# Altium PCB GCM_PCB2.PcbDoc
Units mm, origin at the board's own origin, x right, y up, seen from the top; angles counter-clockwise.
Board outline 75 x 98.5 mm, 4 copper layers (Top Layer, GND, Power and signals, Bottom Layer), stack 0.603 mm thick; 157 components, 99 nets, 525 pads, 0 vias.
Unrouted connection lines stored in the file: 354.
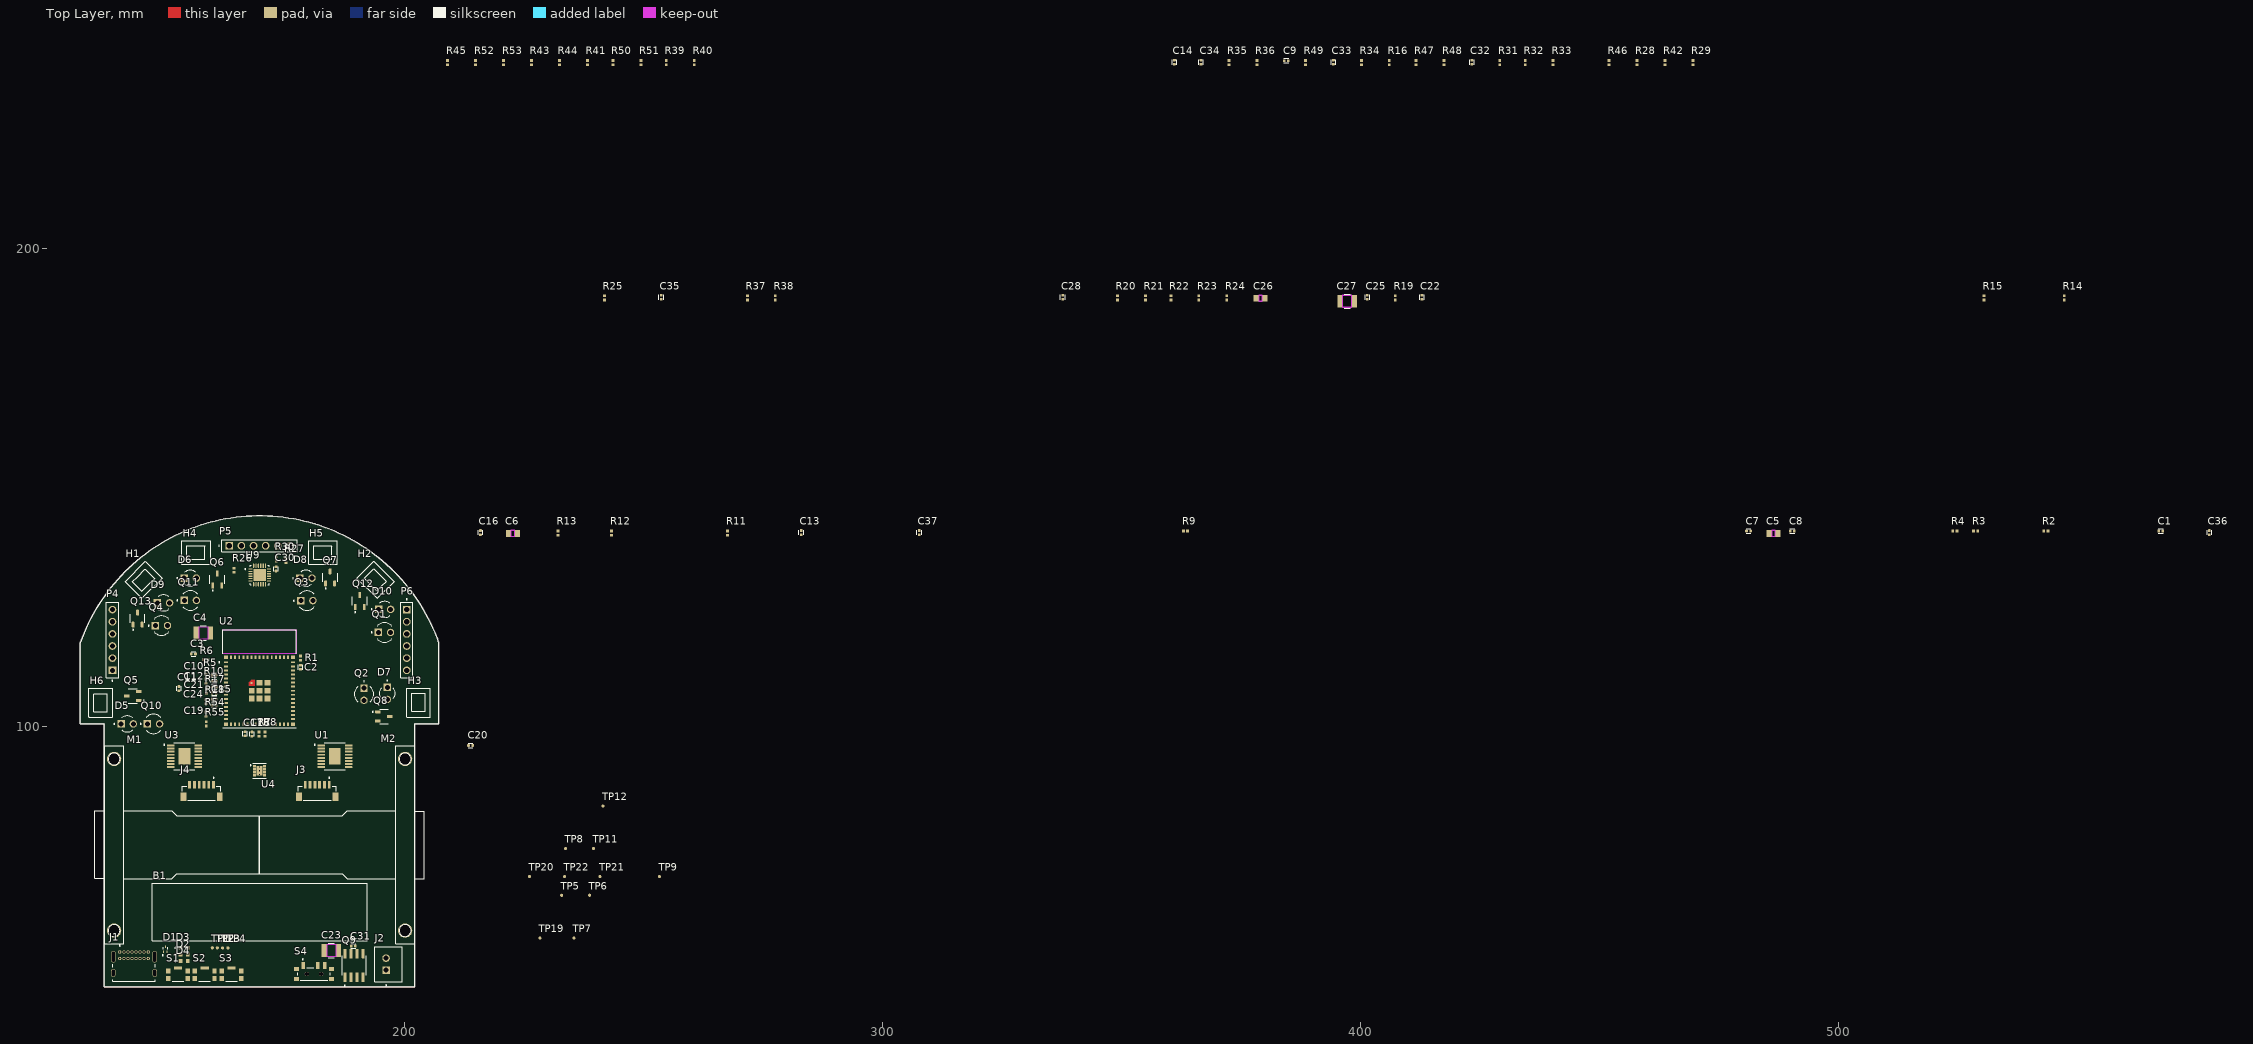
[diagram p0: Top Layer view]
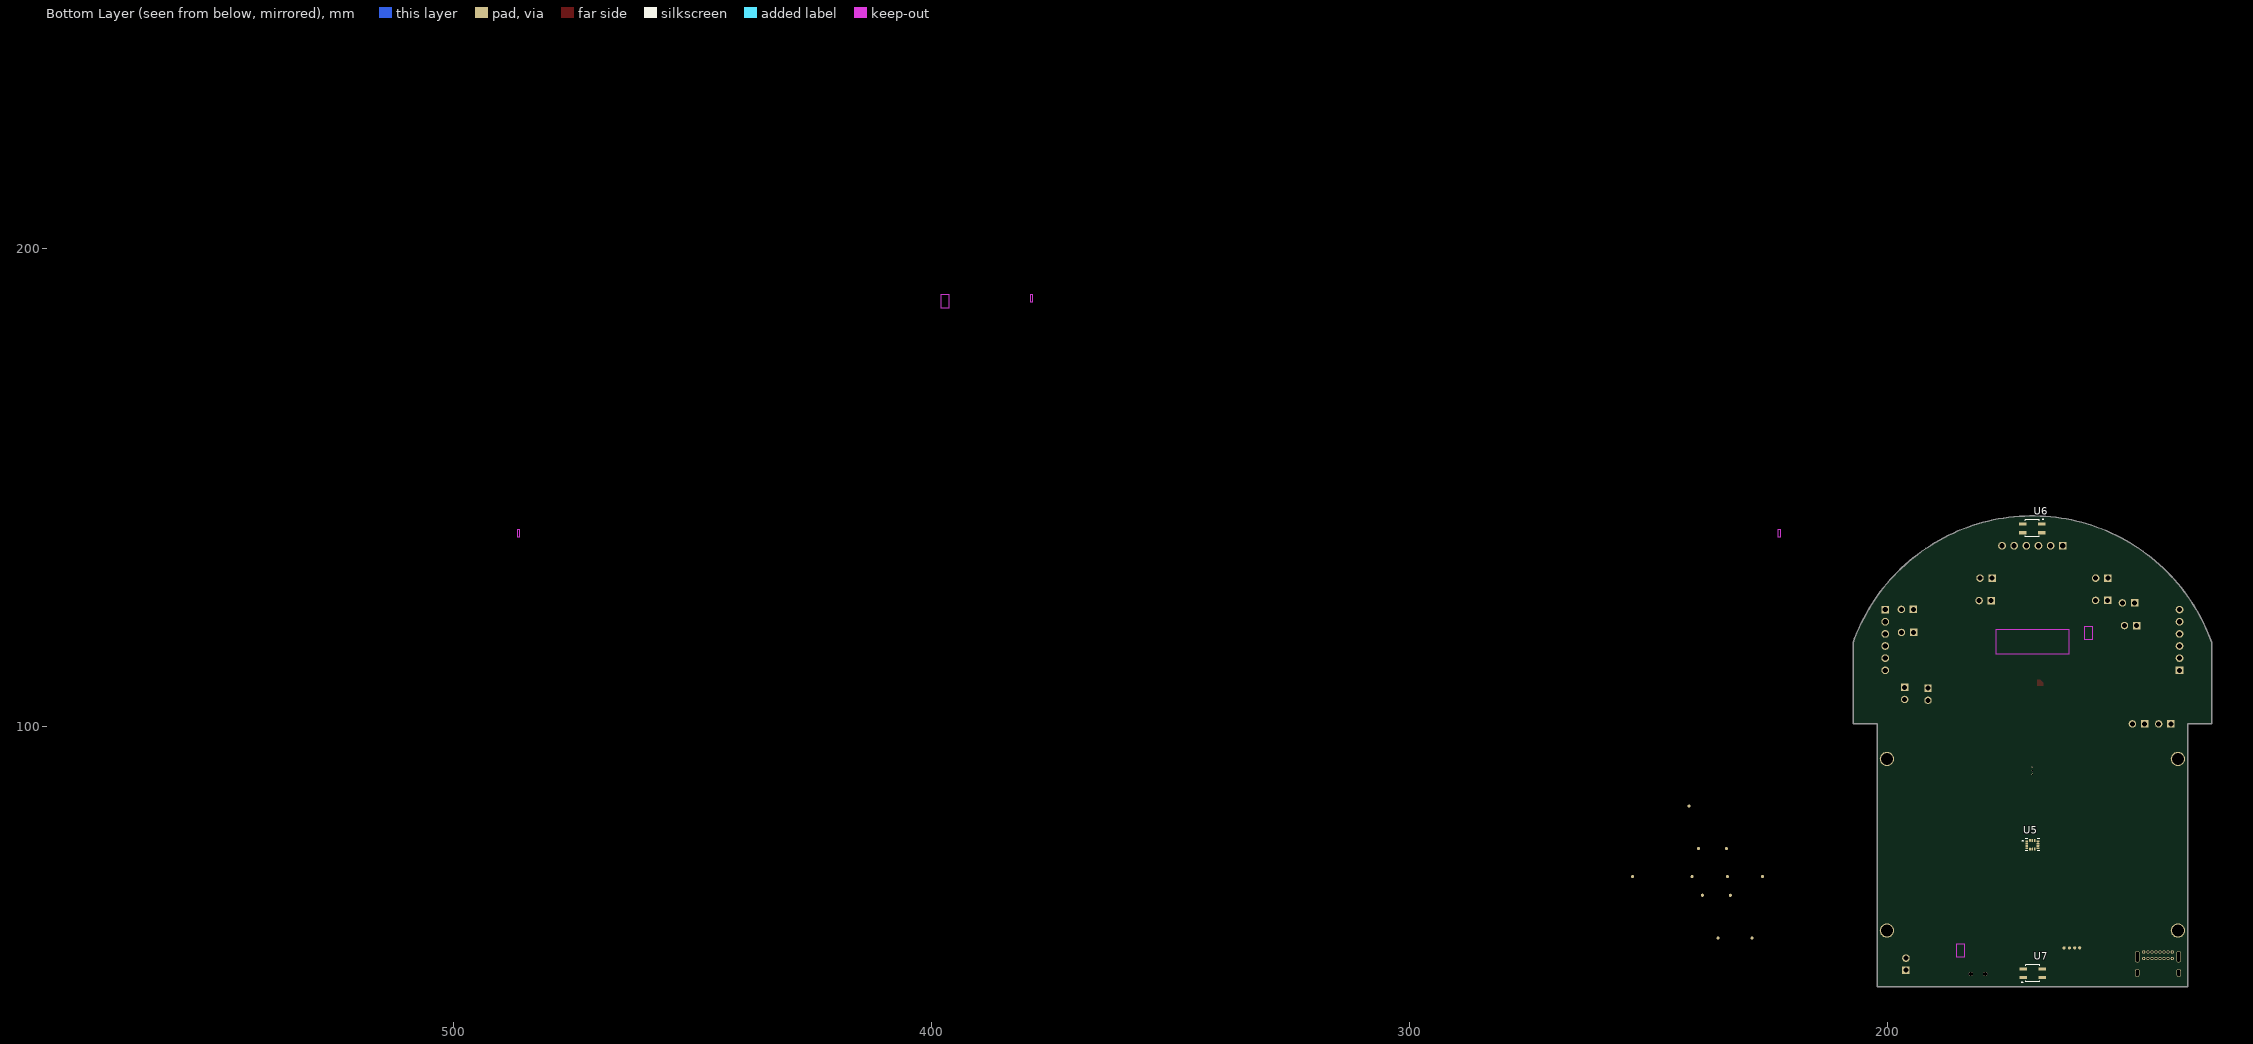
[diagram p1: Bottom Layer view, seen from below]
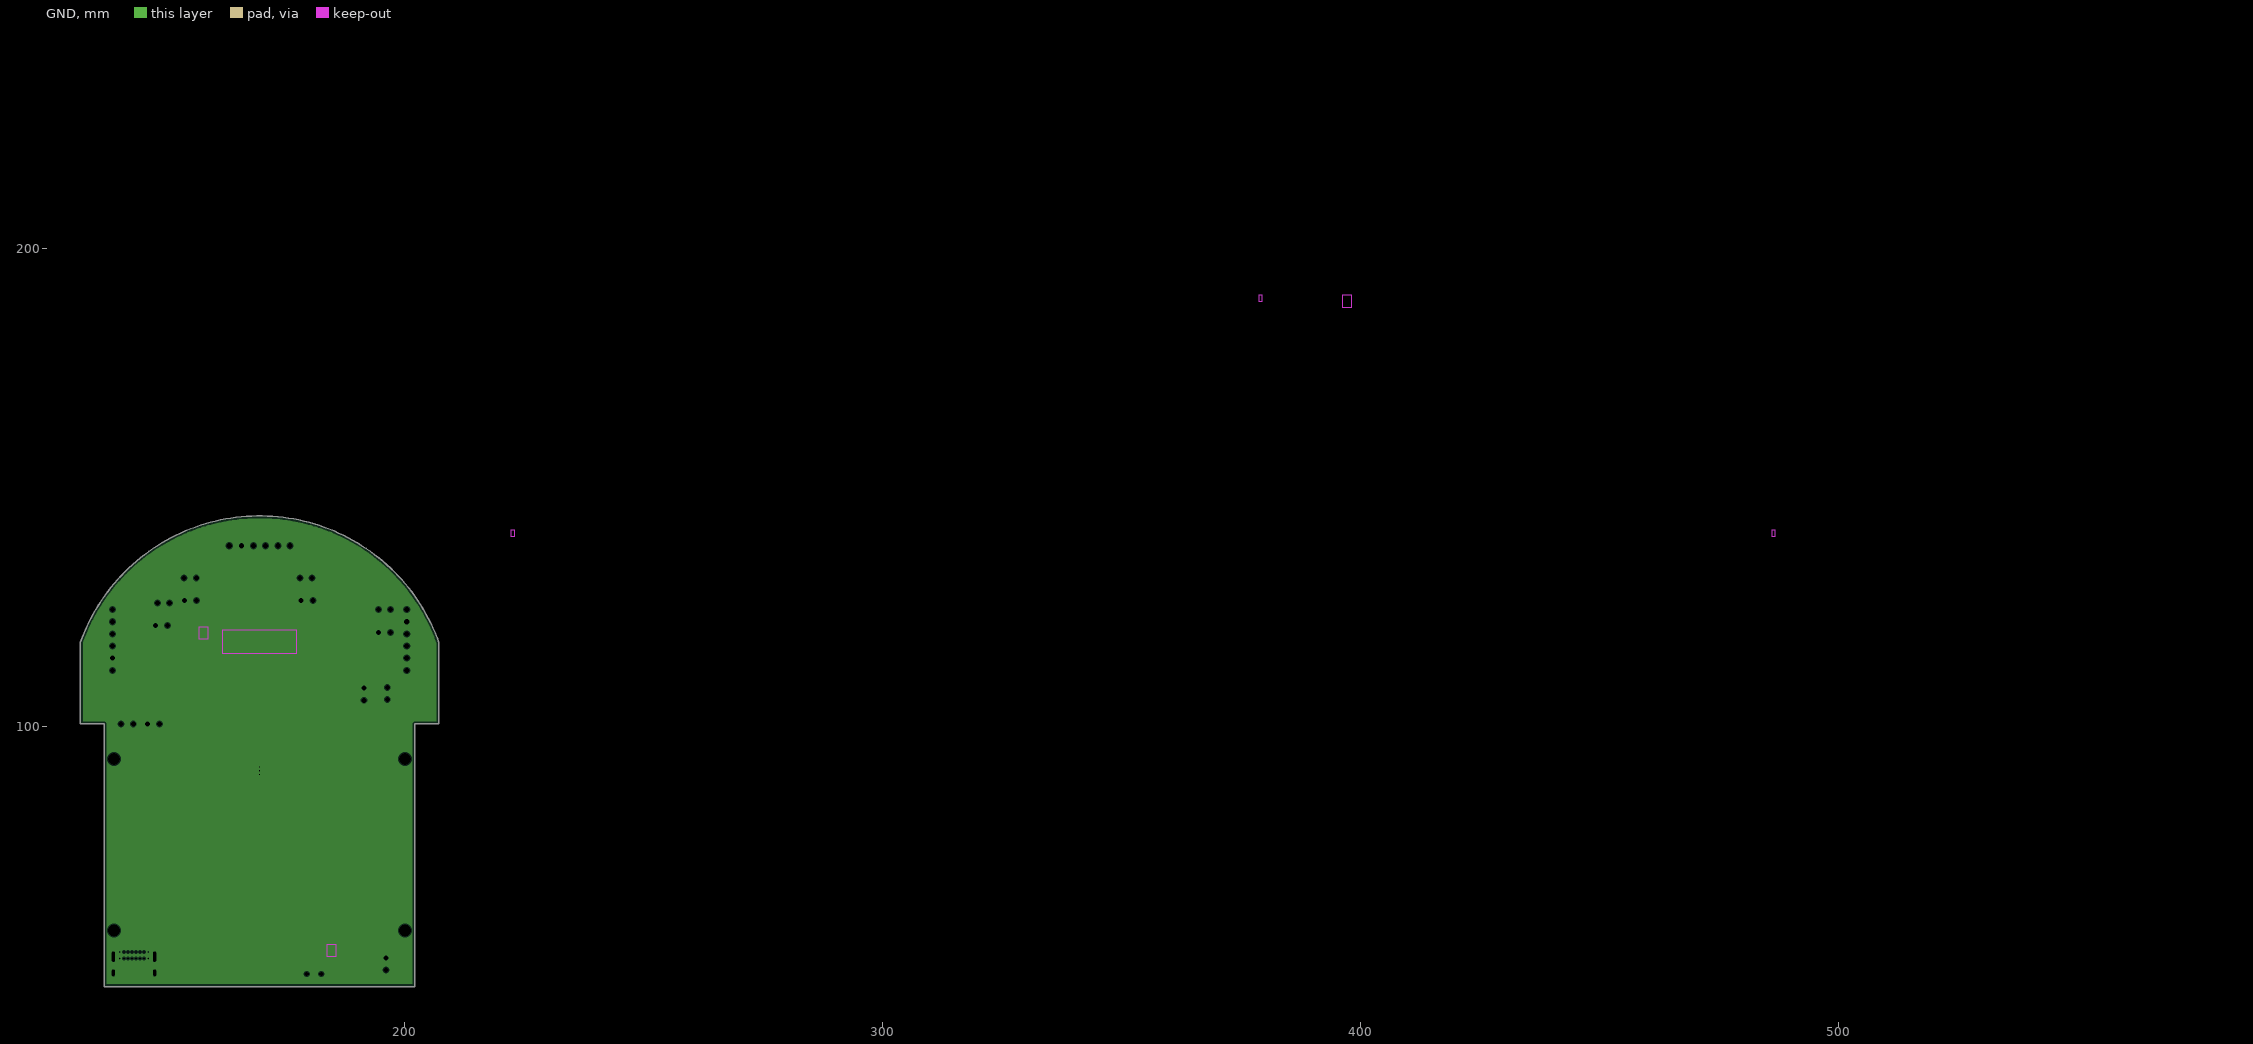
[diagram p2: GND, clearances drawn from the general rule]

## Layer stack, top to bottom
Top Solder: solder mask 0.0102, Solder Resist, Dk 3.5
Top Layer: signal copper 0.0356
Dielectric 2: prepreg 0.0711, PP-006, Dk 4.1
GND: plane copper 0.035, net GND
Dielectric 1: dielectric 0.32, FR-4, Dk 4.8
Power and signals: signal copper 0.035
Dielectric 3: prepreg 0.0711, PP-006, Dk 4.1
Bottom Layer: signal copper 0.0356
Bottom Solder: solder mask 0.0102, Solder Resist, Dk 3.5

## Board outline
132.144,100.563 132.144,117.563 cw(c169.644,104.28) 207.144,117.563 207.144,100.563 202.144,100.563 202.144,45.563 137.144,45.563 137.144,100.563

## Design rules (kind name [scope] priority, off if disabled: settings)
Clearance [All] p1: gap=0.15 ignorepadtopadclearanceinfootprint=FALSE
ComponentClearance [All] p1: gap=0 collisioncheckmode=3 verticalgap=2540 showdistances=FALSE checkcomponentboundary=TRUE
DiffPairsRouting [All] p1: maxlimit=0.254 minlimit=0.254 mostfreqgap=0.254 toplayer_minwidth=0.381 toplayer_maxwidth=0.381 toplayer_prefwidth=0.381 midlayer1_minwidth=0.381 midlayer1_maxwidth=0.381 midlayer1_prefwidth=0.381 bottomlayer_minwidth=0.381 bottomlayer_maxwidth=0.381 bottomlayer_prefwidth=0.381 maxuncoupledlength=12.7
PlaneClearance [All] p1: clearance=0.2
PlaneConnect [All] p1: planeconnectstyle=Relief reliefexpansion=0.508 reliefentries=4 reliefconductorwidth=0.254 reliefairgap=0.254
PolygonConnect [All] p1: connectstyle=Relief reliefconductorwidth=0.254 reliefentries=4 polygonreliefangle="90 Angle" airgapwidth=0.254
RoutingVias [All] p1: holewidth=0.25 width=0.5 viastyle="Through Hole" minholewidth=0.25 minwidth=0.5 maxholewidth=0.25 maxwidth=0.5
SolderMaskExpansion [All] p1: expansion=0.102 istentingtop=FALSE
Width [InNetClass('1.2mm')] p1: maxlimit=1.2 minlimit=1.2 preferedwidth=1.2
26 further rules are at their usual default settings.

## Classes and differential pairs
net class 1.2mm: "1 M1" "1 M2" "2 M1" "2 M2" BAT "VM M1"
differential pair USB: +USB_P -USB_N

## Components (designator, comment, footprint, x,y, rotation, side; value= is the part's Value field where it differs from the comment)
B1 "Bateria" Bateria 169.637,61.2 r180 top
C1 "C426639" CAPC1005X55N 567.419,140.88 r0 top
C2 "C541465" CAPC1005X55N 178.2,112.39 r90 top
C3 "C541465" CAPC1005X55N 155.8,115.2 r0 top
C4 "C914881" CAP_CC1210_YAG 157.851,119.55 r0 top
C5 "C326595" CAP_CC0805_YAG 486.399,140.39 r0 top
C6 "C326595" CAP_CC0805_YAG 222.62,140.39 r0 top
C7 "C541465" CAPC1005X55N 481.159,140.88 r0 top
C8 "C541465" CAPC1005X55N 490.329,140.88 r0 top
C9 "C541465" CAPC1005X55N 384.449,239.3 r0 top
C10 "C541465" CAPC1005X55N 160.08,110.74 r180 top
C11 "C541465" CAPC1005X55N 152.76,107.94 r90 top
C12 "C541465" CAPC1005X55N 160.14,109.45 r180 top
C13 "C426639" CAPC1005X55N 282.969,140.57 r90 top
C14 "C541465" CAPC1005X55N 361.029,238.99 r90 top
C15 "C541465" CAPC1005X55N 160.16,105.7 r180 top
C16 "C541465" CAPC1005X55N 215.82,140.57 r90 top
C17 "C541443" CAPC1005X55N 166.59,98.45 r90 top
C18 "C541443" CAPC1005X55N 168.03,98.42 r90 top
C19 "C541465" CAPC1005X55N 160.15,104.45 r180 top
C20 "C541465" CAPC1005X55N 213.77,96.05 r180 top
C21 "C541465" CAPC1005X55N 160.17,108.24 r180 top
C22 "C541465" CAPC1005X55N 412.829,189.78 r90 top
C23 "C914881" CAP_CC1210_YAG 184.65,53.13 r0 top
C24 "C541465" CAPC1005X55N 160.13,107.01 r180 top
C25 "C527004" CAPC1005X55N 401.399,189.78 r90 top
C26 "C326595" CAP_CC0805_YAG 379.039,189.6 r0 top
C27 "C914881" CAP_CC1210_YAG 397.169,188.97 r0 top
C28 "C541465" CAPC1005X55N 337.679,189.78 r90 top
C30 "C541465" CAPC1005X55N 173.1,132.96 r90 top
C31 "C541465" CAPC1005X55N 189.26,54.06 r0 top
C32 "C541465" CAPC1005X55N 423.269,238.99 r90 top
C33 "C541465" CAPC1005X55N 394.299,238.99 r90 top
C34 "C541465" CAPC1005X55N 366.609,238.99 r90 top
C35 "C541465" CAPC1005X55N 253.679,189.78 r90 top
C36 "C541443" CAPC1005X55N 577.569,140.57 r90 top
C37 "C541443" CAPC1005X55N 307.659,140.57 r90 top
D1 "C97502" SOTFL35P100X50-3N 149.93,53.38 r90 top
D2 "C12624" LED_SM0603UYC 153.86,52.29 r0 top
D3 "C125095" LED_SM0603UYC 153.86,53.69 r0 top
D4 "C965799" LED_SM0603UYC 153.87,50.9 r0 top
D5 "C94135" LEDRD254W45D335H610 141.94,100.53 r0 top
D6 "C94135" LEDRD254W45D335H610 155.12,131.03 r0 top
D7 "C94135" LEDRD254W45D335H610 196.35,106.92 r270 top
D8 "C94135" LEDRD254W45D335H610 179.33,131.03 r0 top
D9 "C94135" LEDRD254W45D335H610 149.53,125.85 r0 top
D10 "C94135" LEDRD254W45D335H610 195.79,124.49 r0 top
H1 "IR Holder" "IR Holder" 145.424,130.625 r45 top
H2 "IR Holder" "IR Holder" 193.85,130.625 r315 top
H3 "IR Holder" "IR Holder" 202.824,104.975 r270 top
H4 "IR Holder" "IR Holder" 156.38,136.34 r0 top
H5 "IR Holder" "IR Holder" 182.89,136.34 r0 top
H6 "IR Holder" "IR Holder" 136.436,104.975 r90 top
J1 "C7095263" GCT_USB4085-GF-A_REVA4 143.36,48.45 r0 top
J2 "C158012" JST_B2B-XH-A 196.615,50.26 r270 top
J3 "C495540" JST-SH6 181.7,86.02 r180 top
J4 "C495540" JST-SH6 157.5,86.02 r180 top
M1 "Motor" MotionSupport 152.294,75.25 r0 top locked
M2 "Motor" MotionSupport 186.98,75.25 r180 top locked
P4 "C40877" FHDR1X6 138.85,118.1 r90 top
P5 "C40877" FHDR1X6 169.64,137.81 r0 top
P6 "C40877" FHDR1X6 200.424,118.1 r270 top locked
Q1 "C118301" XDCR_TEFT4300 195.76,119.67 r0 top
Q2 "C118301" XDCR_TEFT4300 191.48,106.75 r270 top
Q3 "C118301" XDCR_TEFT4300 179.53,126.33 r0 top
Q4 "C118301" XDCR_TEFT4300 149.1,121.11 r0 top
Q5 "C20917" SOT95P280X125-3N 143.09,106.38 r180 top
Q6 "C20917" SOT95P280X125-3N 160.78,130.75 r90 top
Q7 "C20917" SOT95P280X125-3N 184.39,131.185 r90 top
Q8 "C20917" SOT95P280X125-3N 195.63,102.1 r0 top
Q9 "C51499" SOIC127P600X175-8N 189.4,50 r90 top
Q10 "C118301" XDCR_TEFT4300 147.44,100.54 r0 top
Q11 "C118301" XDCR_TEFT4300 155.15,126.37 r0 top
Q12 "C20917" SOT95P280X125-3N 190.59,126.235 r90 top
Q13 "C20917" SOT95P280X125-3N 144.11,122.565 r90 top
R1 "C190095" RESC1005X35N 178.19,114.295 r90 top
R2 "C851064" RESC1005X35N 543.369,140.88 r0 top
R3 "C851064" RESC1005X35N 528.679,140.88 r0 top
R4 "C853263" RESC1005X35N 524.349,140.88 r0 top
R5 "C513664" RESC1005X35N 158.39,111.31 r90 top
R6 "C190095" RESC1005X35N 158.45,113.99 r180 top
R7 "C853143" RESC1005X35N 169.53,98.42 r90 top
R8 "C853143" RESC1005X35N 170.74,98.42 r90 top
R9 "C190095" RESC1005X35N 363.359,140.88 r0 top
R10 "C513664" RESC1005X35N 158.43,109.5 r90 top
R11 "C852752" RESC1005X35N 267.549,140.47 r90 top
R12 "C853263" RESC1005X35N 243.27,140.47 r90 top
R13 "C852886" RESC1005X35N 232.09,140.47 r90 top
R14 "C852886" RESC1005X35N 547.219,189.68 r90 top
R15 "C190095" RESC1005X35N 530.459,189.68 r90 top
R16 "C853143" RESC1005X35N 405.989,238.89 r90 top
R17 "C513664" RESC1005X35N 158.5,107.42 r90 top
R18 "C513664" RESC1005X35N 158.43,105.16 r90 top
R19 "C281774" RESC1005X35N 407.239,189.68 r90 top
R20 "C281778" RESC1005X35N 349.119,189.68 r90 top
R21 "C705627" RESC1005X35N 354.959,189.68 r90 top
R22 "C850993" RESC1005X35N 360.299,189.68 r90 top
R23 "C705627" RESC1005X35N 366.139,189.68 r90 top
R24 "C850993" RESC1005X35N 371.979,189.68 r90 top
R25 "C136979" RESC1005X35N 241.8,189.68 r90 top
R26 "C190095" RESC1005X35N 164.28,132.7 r90 top
R27 "C281778" RESC1005X35N 175.13,134.69 r90 top
R28 "C728561" RESC1005X35N 457.819,238.89 r90 top
R29 "C136979" RESC1005X35N 469.509,238.89 r90 top
R30 "C281778" RESC1005X35N 173.12,135.07 r90 top
R31 "C853143" RESC1005X35N 429.109,238.89 r90 top
R32 "C850993" RESC1005X35N 434.449,238.89 r90 top
R33 "C853143" RESC1005X35N 440.289,238.89 r90 top
R34 "C850993" RESC1005X35N 400.149,238.89 r90 top
R35 "C853143" RESC1005X35N 372.459,238.89 r90 top
R36 "C850993" RESC1005X35N 378.299,238.89 r90 top
R37 "C853143" RESC1005X35N 271.689,189.68 r90 top
R38 "C850993" RESC1005X35N 277.529,189.68 r90 top
R39 "C705627" RESC1005X35N 254.729,238.89 r90 top
R40 "C705627" RESC1005X35N 260.579,238.89 r90 top
R41 "C705627" RESC1005X35N 238.22,238.89 r90 top
R42 "C705627" RESC1005X35N 463.669,238.89 r90 top
R43 "C190095" RESC1005X35N 226.53,238.89 r90 top
R44 "C190095" RESC1005X35N 232.37,238.89 r90 top
R45 "C190095" RESC1005X35N 208.99,238.89 r90 top
R46 "C190095" RESC1005X35N 451.979,238.89 r90 top
R47 "C850993" RESC1005X35N 411.579,238.89 r90 top
R48 "C853143" RESC1005X35N 417.429,238.89 r90 top
R49 "C850993" RESC1005X35N 388.459,238.89 r90 top
R50 "C705627" RESC1005X35N 243.55,238.89 r90 top
R51 "C705627" RESC1005X35N 249.4,238.89 r90 top
R52 "C190095" RESC1005X35N 214.84,238.89 r90 top
R53 "C190095" RESC1005X35N 220.68,238.89 r90 top
R54 "C513664" RESC1005X35N 158.46,102.585 r90 top
R55 "C513664" RESC1005X35N 158.47,100.525 r90 top
S1 "C72443" SW_KMR221GLFS 152.58,48.045 r0 top
S2 "C72443" SW_KMR221GLFS 158.15,48.05 r0 top
S3 "C72443" SW_KMR221GLFS 163.74,48.05 r0 top
S4 "C3664642" SW_EG1215AA 181.02,48.22 r0 top
TP1 "Test Point" TestPoint 159.74,53.7 r90 top
TP2 "Test Point" TestPoint 160.78,53.69 r90 top
TP3 "Test Point" TestPoint 161.88,53.68 r90 top
TP4 "Test Point" TestPoint 163.01,53.67 r90 top
TP5 "Test Point" TestPoint 232.84,64.68 r90 top
TP6 "Test Point" TestPoint 238.69,64.68 r90 top
TP7 "Test Point" TestPoint 235.389,55.74 r90 top
TP8 "Test Point" TestPoint 233.67,74.46 r90 top
TP9 "Test Point" TestPoint 253.279,68.6 r90 top
TP11 "Test Point" TestPoint 239.52,74.46 r90 top
TP12 "Test Point" TestPoint 241.48,83.33 r90 top
TP19 "Test Point" TestPoint 228.269,55.74 r90 top
TP20 "Test Point" TestPoint 226.089,68.6 r90 top
TP21 "Test Point" TestPoint 240.829,68.6 r90 top
TP22 "Test Point" TestPoint 233.459,68.6 r90 top
U1 "C1855818" SOP65P640X120-17N 185.375,93.76 r0 top locked
U2 "C2913206" XCVR_ESP32-S3-MINI-1-N8 169.63,107.48 r0 top
U3 "C1855818" SOP65P640X120-17N 153.899,93.76 r0 top
U4 "C163210" CONV_TPS82140SILR 169.64,90.735 r0 top
U5 "C22459454" PQFN50P300X250X97-14N 169.637,75.25 r180 bottom locked
U6 "C232862" SOIC180P460X187-4N 169.637,141.46 r270 bottom
U7 "C232862" SOIC180P460X187-4N 169.6,48.37 r90 bottom
U9 "C140277" QFN50P400X400X80-25N 169.635,131.69 r0 top

## Footprints (in the part's own frame and the unit in brackets; to place one, negate y for a bottom-side part, rotate by r counter-clockwise, add the part's x,y. Pads: shape width x height; smd on the part's side, far side on the other; paste and mask are expansions set on the pad)
Bateria [mm]
  silkscreen extent -22.5,-6 22.5,6.06, body extent -22.52,-5.94 22.48,6.06, height 16
CAP_CC0805_YAG [mil]
  rect 44x57 smd paste+0 mask+0: 1(-35.31,0) 2(35.31,0)
  Top Layer keep-out region: -11.31,-26.5 -11.31,26.5 11.31,26.5 11.31,-26.5
  Keep-Out Layer region: -11.31,-28.5 -11.31,28.5 11.31,28.5 11.31,-28.5
  body extent -43,-29 43,29, height 57
CAP_CC1210_YAG [mil]
  rect 44x106 smd paste+0 mask+0: 1(-59,0) 2(59,0)
  Top Layer keep-out region: -35,-51 -35,51 35,51 35,-51
  Keep-Out Layer region: -35,-53 -35,53 35,53 35,-53
  silkscreen extent -25,-58 25,58, body extent -67,-53 67,53, height 106
CAPC1005X55N [mm]
  rrect53% 0.54x0.6 smd: 1(-0.43,0) 2(0.43,0)
  silkscreen extent -0.5,-0.48 0.5,0.48, body extent -0.5,-0.25 0.5,0.25, height 0.55
CONV_TPS82140SILR [mm]
  rrect5% 0.6x0.5 smd paste-1 mask+0: 1(-1.05,0.975) 2(-1.05,0.325) 3(-1.05,-0.325) 4(-1.05,-0.975) 5(1.05,-0.975) 6(1.05,-0.325) 7(1.05,0.325) 8(1.05,0.975)
  rrect5% 1.2x2 smd paste-2 mask+0: 9(0,0)
  round 0.3 hole 0.2 mask+0: 10(0,0.75) 11(0,0) 12(0,-0.75)
  silkscreen extent -2,-1.55 1.4,1.55, body extent -1.5,-1.4 1.5,1.4, height 1.53
FHDR1X6 [mm]
  rect 1.605x1.605 / inner round 1.605 / far side rect 1.605x1.605 hole 1.07: 1(-6.35,0)
  round 1.605 hole 1.07: 2(-3.81,0) 3(-1.27,0) 4(1.27,0) 5(3.81,0) 6(6.35,0)
  silkscreen extent -8.6,-1.27 7.87,1.27, body extent -7.87,-1.27 7.88,1.27, height 8.51
GCT_USB4085-GF-A_REVA4 [mm]
  round 0.65 hole 0.4: A1(-2.975,4.36) A4(-2.125,4.36) A5(-1.275,4.36) A6(-0.425,4.36) A7(0.425,4.36) A8(1.275,4.36) A9(2.125,4.36) A12(2.975,4.36) B1(2.975,3.01) B4(2.125,3.01) B5(1.275,3.01) B6(0.425,3.01) B7(-0.425,3.01) B8(-1.275,3.01) B9(-2.125,3.01) B12(-2.975,3.01)
  oval 0.9x1.7 hole 0.6 slot 1.4 at 90 deg: S1(-4.325,0) S2(4.325,0)
  oval 0.9x2.4 hole 0.6 slot 2.1 at 90 deg: S3(-4.325,3.38) S4(4.325,3.38)
  silkscreen extent -4.47,-1.74 4.47,5.8, body extent -4.47,-4.25 4.47,4.92, height 3.46
"IR Holder" [mm]
  silkscreen extent -3.01,-2.43 3,2.55, body extent -3.01,-2.49 2.99,2.51, height 10.6
JST-SH6 [mm]
  rect 0.6x1.55 smd: 1(-2.5,-1.775) 2(-1.5,-1.775) 3(-0.5,-1.775) 4(0.5,-1.775) 5(1.5,-1.775) 6(2.5,-1.775)
  rect 1.2x1.8 smd: S1(-3.8,0.75) S2(3.8,0.75)
  silkscreen extent -4,-3.35 4,1.45, body extent -3.87,-2.14 4.13,1.46, height 4.25
JST_B2B-XH-A [mm]
  rect 1.575x1.575 / inner round 1.575 / far side rect 1.575x1.575 hole 1.05: 1(1.25,-0.525)
  round 1.575 hole 1.05: 2(-1.25,-0.525)
  silkscreen extent -3.7,-2.88 4.54,2.88, body extent -3.72,-2.88 3.68,2.88, height 7
LED_SM0603UYC [mm]
  rect 0.8x0.8 smd: A(0.75,0) C(-0.75,0)
  silkscreen extent -1.95,-0.1 -1.75,0.1, body extent -0.8,-0.4 0.8,0.4, height 0.6
LEDRD254W45D335H610 [mm]
  round 1.56 hole 1.04: A(1.27,0)
  rect 1.56x1.56 hole 1.04: C(-1.27,0)
  silkscreen extent -2.8,-1.68 1.12,1.68, body extent -1.6,-1.95 1.6,1.95, height 6.1
MotionSupport [mm]
  round 3 hole 2.5: 14(-13.1,17.95) 15(-13.1,-17.95)
  silkscreen extent -17.1,-20.75 17.4,20.75, body extent -25.07,-20.76 17.39,20.74, height 17.8
PQFN50P300X250X97-14N [mm]
  rrect50% 0.59x0.35 smd mask+0: 1(-1.165,0.75) 2(-1.165,0.25) 3(-1.165,-0.25) 4(-1.165,-0.75) 8(1.165,-0.75) 9(1.165,-0.25) 10(1.165,0.25) 11(1.165,0.75)
  rrect50% 0.35x0.59 smd mask+0: 5(-0.5,-0.915) 6(0,-0.915) 7(0.5,-0.915) 12(0.5,0.915) 13(0,0.915) 14(-0.5,0.915)
  silkscreen extent -2.1,-1.25 1.5,1.25, body extent -1.5,-1.27 1.5,1.23, height 0.97
QFN50P400X400X80-25N [mm]
  rrect25% 0.86x0.27 smd: 1(-1.935,1.25) 2(-1.935,0.75) 3(-1.935,0.25) 4(-1.935,-0.25) 5(-1.935,-0.75) 6(-1.935,-1.25) 13(1.935,-1.25) 14(1.935,-0.75) 15(1.935,-0.25) 16(1.935,0.25) 17(1.935,0.75) 18(1.935,1.25)
  rrect25% 0.27x0.86 smd: 7(-1.25,-1.935) 8(-0.75,-1.935) 9(-0.25,-1.935) 10(0.25,-1.935) 11(0.75,-1.935) 12(1.25,-1.935) 19(1.25,1.935) 20(0.75,1.935) 21(0.25,1.935) 22(-0.25,1.935) 23(-0.75,1.935) 24(-1.25,1.935)
  rect 2.6x2.6 smd paste-2: 25(0,0)
  silkscreen extent -3.07,-2 2,2, body extent -2,-2 2,2, height 0.8
RESC1005X35N [mm]
  rect 0.56x0.6 smd paste+0 mask+0.102: 1(-0.435,0) 2(0.435,0)
  body extent -0.5,-0.25 0.5,0.25, height 0.35
SOIC127P600X175-8N [mm]
  rrect15% 1.97x0.6 smd: 1(-2.475,1.905) 2(-2.475,0.635) 3(-2.475,-0.635) 4(-2.475,-1.905) 5(2.475,-1.905) 6(2.475,-0.635) 7(2.475,0.635) 8(2.475,1.905)
  silkscreen extent -4.3,-2.5 2,2.5, body extent -3,-2.45 3,2.45, height 1.75
SOIC180P460X187-4N [mm]
  rect 0.69x1.57 smd: 1(-0.9,1.975) 2(-0.9,-1.975) 3(0.9,-1.975) 4(0.9,1.975)
  silkscreen extent -2,-1.45 1.8,2.3, body extent -1.7,-2.3 1.7,2.3, height 1.87
SOP65P640X120-17N [mm]
  rrect25% 1.57x0.41 smd: 1(-2.87,2.275) 2(-2.87,1.625) 3(-2.87,0.975) 4(-2.87,0.325) 5(-2.87,-0.325) 6(-2.87,-0.975) 7(-2.87,-1.625) 8(-2.87,-2.275) 9(2.87,-2.275) 10(2.87,-1.625) 11(2.87,-0.975) 12(2.87,-0.325) 13(2.87,0.325) 14(2.87,0.975) 15(2.87,1.625) 16(2.87,2.275)
  rect 2.48x3.4 smd paste-3: 17(0,0)
  silkscreen extent -4.3,-2.8 2.2,2.8, body extent -3.2,-2.5 3.2,2.5, height 1.2
SOT95P280X125-3N [mm]
  rrect50% 1.21x0.59 smd: 1(-1.255,0.95) 2(-1.255,-0.95) 3(1.255,0)
  silkscreen extent -2.41,-1.55 0.9,1.55, body extent -1.4,-1.45 1.4,1.45, height 1.25
SOTFL35P100X50-3N [mm]
  rrect25% 0.46x0.2 smd: 1(-0.52,0.35) 2(-0.52,-0.35) 3(0.52,0)
  silkscreen extent -1.35,-0.5 0.4,0.65, body extent -0.5,-0.5 0.5,0.5, height 0.5
SW_EG1215AA [mm]
  rect 0.7x1.5 smd paste+0 mask+0.102: 1(-2.25,1.75) 2(0.75,1.75) 3(2.25,1.75)
  rect 1x0.8 smd paste+0 mask+0.102: S1(-3.65,1.05) S2(-3.65,-1.05) S3(3.65,-1.05) S4(3.65,1.05)
  round 0.9 hole 0.9 unplated mask+0: ""(-1.5,0) ""(1.5,0)
  silkscreen extent -3.35,-1.3 3.35,3.17, body extent -3.85,-2.7 3.85,2.2, height 1.3
SW_KMR221GLFS [mm]
  rect 0.9x1 smd: 1(-2.05,0.8) 2(-2.05,-0.8) 3(2.05,-0.8) 4(2.05,0.8)
  rect 1.7x0.55 smd: 5(0,1.425)
  silkscreen extent -1.2,-1.4 1.2,-1.4, body extent -2.3,-1.4 2.3,1.4, height 1.9
TestPoint [mm]
  round 0.65 smd far side: 1(0,0)
  round 0.65 smd: 2(0,0)
XCVR_ESP32-S3-MINI-1-N8 [mm]
  rect 0.8x0.4 smd: 1(-7,5.95) 2(-7,5.1) 3(-7,4.25) 4(-7,3.4) 5(-7,2.55) 6(-7,1.7) 7(-7,0.85) 8(-7,0) 9(-7,-0.85) 10(-7,-1.7) 11(-7,-2.55) 12(-7,-3.4) 13(-7,-4.25) 14(-7,-5.1) 15(-7,-5.95) 31(7,-5.95) 32(7,-5.1) 33(7,-4.25) 34(7,-3.4) 35(7,-2.55) 36(7,-1.7) 37(7,-0.85) 38(7,0) 39(7,0.85) 40(7,1.7) 41(7,2.55) 42(7,3.4) 43(7,4.25) 44(7,5.1) 45(7,5.95)
  rect 0.4x0.8 smd: 16(-5.95,-7) 17(-5.1,-7) 18(-4.25,-7) 19(-3.4,-7) 20(-2.55,-7) 21(-1.7,-7) 22(-0.85,-7) 23(0,-7) 24(0.85,-7) 25(1.7,-7) 26(2.55,-7) 27(3.4,-7) 28(4.25,-7) 29(5.1,-7) 30(5.95,-7) 46(5.95,7) 47(5.1,7) 48(4.25,7) 49(3.4,7) 50(2.55,7) 51(1.7,7) 52(0.85,7) 53(0,7) 54(-0.85,7) 55(-1.7,7) 56(-2.55,7) 57(-3.4,7) 58(-4.25,7) 59(-5.1,7) 60(-5.95,7)
  rect 1.2x1.2 smd: 61(0,0) 61_2(0,1.65) 61_3(1.65,1.65) 61_4(1.65,0) 61_5(1.65,-1.65) 61_6(0,-1.65) 61_7(-1.65,-1.65) 61_8(-1.65,0)
  rect 0.4x0.4 smd paste-1 mask+0: 61_1(-1.65,1.65)
  rect 0.8x0.8 smd: 62(-7,7) 63(-7,-7) 64(7,-7) 65(7,7)
  Top Layer region: -1.05,1.05 -2.25,1.05 -2.25,1.65 -1.65,2.25 -1.05,2.25
  Keep-Out Layer region: 7.7,7.725 -7.7,7.725 -7.7,12.775 7.7,12.775
  Keep-Out Layer region: 7.7,7.725 -7.7,7.725 -7.7,12.775 7.7,12.775
  silkscreen extent -8.55,-7.73 7.7,12.78, body extent -7.7,-7.73 7.7,12.77, height 2.55
XDCR_TEFT4300 [mm]
  round 1.56 hole 1.04: C(1.27,0)
  rect 1.56x1.56 / inner round 1.56 / far side rect 1.56x1.56 hole 1.04: E(-1.27,0)
  silkscreen extent -2.8,-2.03 1.55,2.03, body extent -1.6,-1.95 1.6,1.95, height 6.1

## Part data
B1: Package=None, Check_prices=https://www.snapeda.com/parts/B2P-VH(LF)(SN)/JST/view-part/?ref=eda, MF="JST Sales", MP=B2P-VH(LF)(SN), SnapEDA_Link=https://www.snapeda.com/parts/B2P-VH(LF)(SN)/JST/view-part/?ref=snap
C1 C2 C3 C7 C8 C9 C10 C11 C12 C13 C14 C15 C16 C17 C18 C19 C20 C21 C22 C24 C25 C28 C30 C31 C32 C33 C34 C35 C36 C37: library part CC0402JRX7R8BB103, "10000 pF Â±5% 25V Ceramic Capacitor X7R 0402 (1005 Metric)", Package="0402 Yageo", Check_prices=https://www.snapeda.com/parts/CC0402JRX7R8BB103/Yageo/view-part/?ref=eda, MF=Yageo, MP=CC0402JRX7R8BB103, SnapEDA_Link=https://www.snapeda.com/parts/CC0402JRX7R8BB103/Yageo/view-part/?ref=snap
C4 C23 C27: library part CC1210KKX7R7BB226, "Description", Manufacturer_Name=Yageo, Copyright="Copyright (C) 2026 Ultra Librarian. All rights reserved.", Manufacturer_Part_Number=CC1210KKX7R7BB226
C5 C6 C26: library part CC0805KKX7R7BB106, "Description", Manufacturer_Name=Yageo, Copyright="Copyright (C) 2026 Ultra Librarian. All rights reserved.", Manufacturer_Part_Number=CC0805KKX7R7BB106
D1: library part TPD2EUSB30DRTR, "2-channel ESD solution for SuperSpeed USB 3.0 interface 3-SOT-9X3 -40 to 85", Package="SOT-9X3-3 Texas Instruments", Availability=Warning, MF="Texas Instruments", MP=TPD2EUSB30DRTR, Price=None, Purchase-URL=https://pricing.snapeda.com/search/part/TPD2EUSB30DRTR/?ref=eda, SnapEDA_Link=https://www.snapeda.com/parts/TPD2EUSB30DRTR/Texas%20Instruments/view-part/189118/?ref=snap
D2 D3 D4: library part SM0603UYC, "LED SMD 0603 Ultra Yellow 593nm 70mcd Water Clear Lens 130 Deg Viewing Angle", Package="0603 Bivar", Check_prices=https://www.snapeda.com/parts/SM0603UYC/Bivar/view-part/?ref=eda, MF=Bivar, MP=SM0603UYC, SnapEDA_Link=https://www.snapeda.com/parts/SM0603UYC/Bivar/view-part/?ref=snap
D5 D6 D7 D8 D9 D10: library part TSAL4400, "Infrared Emitter 940nm 36mW/sr Circular Top Mount 2-Pin T-1 Bulk", Package="Radial Vishay", Availability=Unavailable, MF="Vishay Semiconductor", MP=TSAL4400, Price=None, SnapEDA_Link=https://www.snapeda.com/parts/TSAL4400/Vishay%20Semiconductor%20Opto%20Division/view-part/3623381/?ref=snap
J1: library part USB4085-GF-A_REVA4, "USB-C (USB TYPE-C) USB 2.0 Receptacle Connector 24 (16+8 Dummy) Position Through Hole, Right Angle, low cost, 3.46mm profile, 16 pin, horizontal, Top mount", Package=None, Availability="In Stock", Check_prices=https://www.snapeda.com/parts/USB4085-GF-A/Global+Connector+Technology/view-part/?ref=eda, MF="Global Connector Technology", MP=USB4085-GF-A, Price=None, Purchase-URL=https://pricing.snapeda.com/search/part/USB4085-GF-A/?ref=eda, SnapEDA_Link=https://www.snapeda.com/parts/USB4085-GF-A/Global+Connector+Technology/view-part/?ref=snap
J2: library part B2B-XH-A, Package=None, Availability=Unavailable, MF="{'manufacturer': u'JST Sales America Inc.'}", MP=B2B-XH-A, Price=None
J3 J4: library part JST-SH6, Package=None, Availability=Unavailable, MP=BM06B-SRSS-TB(LF)(SN), Price=None
P4 P5 P6: library part "FHeader 6X1", LatestRevisionDate=17-Jul-2002, LatestRevisionNote="Re-released for DXP Platform.", Publisher="Altium Limited"
Q1 Q2 Q3 Q4 Q10 Q11: library part TEFT4300, "Phototransistors 925nm Top View Radial, 3mm Dia (T-1)", Package=None, Check_prices=https://www.snapeda.com/parts/TEFT4300/Vishay/view-part/?ref=eda, MF="Vishay Semiconductor", MP=TEFT4300, SnapEDA_Link=https://www.snapeda.com/parts/TEFT4300/Vishay/view-part/?ref=snap
Q5 Q6 Q7 Q8 Q12 Q13: library part AO3400A, "N-Channel 30 V 5.7A (Ta) 1.4W (Ta) Surface Mount SOT-23-3", Package="SOT-23 Alpha &amp; Omega Semiconductor Inc.", Check_prices=https://www.snapeda.com/parts/AO3400A/Alpha/view-part/?ref=eda, MF="Alpha & Omega Semiconductor", MP=AO3400A, SnapEDA_Link=https://www.snapeda.com/parts/AO3400A/Alpha/view-part/?ref=snap
Q9: library part AO4485, "P-Channel 40 V 10A (Ta) 1.7W (Ta) Surface Mount 8-SOIC", Package="SOIC-8 Alpha &amp; Omega Semiconductor", Check_prices=https://www.snapeda.com/parts/AO4485/Alpha/view-part/?ref=eda, MF="Alpha &", MP=AO4485, SnapEDA_Link=https://www.snapeda.com/parts/AO4485/Alpha/view-part/?ref=snap
R1 R2 R3 R4 R5 R6 R7 R8 R9 R10 R11 R12 R13 R14 R15 R16 R17 R18 R19 R20 R21 R22 R23 R24 R25 R26 R27 R28 R29 R30 R31 R32 R33 R34 R35 R36 R37 R38 R39 R40 R41 R42 R43 R44 R45 R46 R47 R48 R49 R50 R51 R52 R53 R54 R55: library part RT0402FRE0724KL, "RT Series 0402 0.063 W 24 kOhm Â±1 % Â±50 ppm/Â°C SMT Thin Film Chip Resistor", Package="1005 Yageo", Check_prices=https://www.snapeda.com/parts/RT0402FRE0724KL/Yageo/view-part/?ref=eda, MF=Yageo, MP=RT0402FRE0724KL, SnapEDA_Link=https://www.snapeda.com/parts/RT0402FRE0724KL/Yageo/view-part/?ref=snap
S1 S2 S3: library part KMR221GLFS, "Switch Tactile N.O. SPST Button Gull Wing 0.05A 32VDC 1VA 200000Cycles 2N SMD Automotive T/R", Package=None, Check_prices=https://www.snapeda.com/parts/KMR221G%20LFS/C%2526K/view-part/?ref=eda, MF=CK, MP="KMR221G LFS", SnapEDA_Link=https://www.snapeda.com/parts/KMR221G%20LFS/C%2526K/view-part/?ref=snap
S4: library part EG1215AA, "Slide Switch SPDT Surface Mount, Right Angle", Package=None, Check_prices=https://www.snapeda.com/parts/EG1215AA/E-Switch/view-part/?ref=eda, MF=E-Switch, MP=EG1215AA, SnapEDA_Link=https://www.snapeda.com/parts/EG1215AA/E-Switch/view-part/?ref=snap
U1 U3: library part DRV8874PWPR, "40-V, 6-A H-bridge motor driver with integrated current sensing feedback", Package="HTSSOP-16 Texas Instruments", Check_prices=https://www.snapeda.com/parts/DRV8874PWPR/Texas+Instruments/view-part/?ref=eda, MF="Texas Instruments", MP=DRV8874PWPR, SnapEDA_Link=https://www.snapeda.com/parts/DRV8874PWPR/Texas+Instruments/view-part/?ref=snap
U2: library part ESP32-S3-MINI-1-N8, Package=None, Availability=Unavailable, MF="{'manufacturer': u'Espressif Systems'}", MP=ESP32-S3-MINI-1-N8, Price=None
U4: library part TPS82130SILT, "Non-Isolated PoL Module DC DC Converter 1 Output 0.9 ~ 5V - - - 3A 3V - 17V Input", Package=None, Check_prices=https://www.snapeda.com/parts/TPS82130SIL/Texas+Instruments/view-part/?ref=eda, MF="Texas Instruments", MP=TPS82130SIL, SnapEDA_Link=https://www.snapeda.com/parts/TPS82130SIL/Texas+Instruments/view-part/?ref=snap
U5: library part ICM-45686, "Accelerometer, Gyroscope, 6 Axis Sensor Output", Package=None, Availability=Unavailable, MP=ICM-42688-P, Price=None
U6 U7: library part QRE1113GR, "Reflective Optical Sensor 0.039 (1mm) 4-SMD, Gull Wing", Package="ARUSM-313-4 ON Semiconductor", Availability="In Stock", Check_prices=https://www.snapeda.com/parts/QRE1113GR/Onsemi/view-part/?ref=eda, MF="ON Semiconductor", MP=QRE1113GR, Price=None, Purchase-URL=https://pricing.snapeda.com/search/part/QRE1113GR/?ref=eda, SnapEDA_Link=https://www.snapeda.com/parts/QRE1113GR/Onsemi/view-part/?ref=snap
U9: library part TCA9555RTWR, Package=None, Availability=Unavailable, MP=TCA9555RTWR, Price=None
M1 M2: LatestRevisionDate=17-Jul-2002, LatestRevisionNote="Re-released for DXP Platform.", Publisher="Altium Limited"

## Free pads (board coordinates)
  round 3 hole 2.5: 3(139.194,57.3) 3(139.194,93.2) 3(200.08,57.3) 3(200.08,93.2)

## Nets (pads, with @x,y where several pads share a name; then routed paths per layer and width w, separated by ;. In a path a pad name is that pad's centre, name@x,y a point inside that pad or via, vN(x,y) a via of type N, cw(c..) or ccw(c..) an arc to the next point about the centre after c; other vN are vias at no path point)
"1 A": J3.4 TP19.1 U2.28
"1 B": J3.5 TP20.1 U2.29
"1 M1": J3.1 U1.8
"1 M2": J3.2 U1.10
"2 A": J4.4 TP21.1 U2.31
"2 B": J4.5 TP22.1 U2.32
"2 M1": J4.1 U3.8
"2 M2": J4.2 U3.10
"5V USB": J1.A4 J1.A9 J1.B4 J1.B9
"ADC WALL IR 1": C10.1 R5.2 U2.5
"ADC WALL IR 2": C12.1 R10.2 U2.6
"ADC WALL IR 3": C21.1 R17.2 U2.7
"ADC WALL IR 4": C24.1 R18.2 U2.8
"ADC WALL IR 5": C15.1 R54.2 U2.9
"ADC WALL IR 6": C19.1 R55.2 U2.10
BAT: J2.1 Q9.1 Q9.2 Q9.3 R25.2
BOOT: R6.1 S1.2 S1.3 U2.4
CS: U2.14 U5.12
"DIR M1": U1.2 U2.34
"DIR M2": U2.30 U3.2
EN: C2.2 R1.1 S2.2 S2.3 TP8.1 U2.45
FB: R19.2 R20.1 U4.6
GND: C2.1 C3.2 C4.1 C5.1 C6.1 C7.2 C9.2 C10.2 C11.2 C12.2 C14.2 C15.2 C16.2 C17.2 C18.2 C19.2 C21.2 C22.2 C23.1 C24.2 C25.2 C26.1 C27.1 C28.2 C30.2 C31.2 C32.2 C33.2 C34.2 C35.2 C36.2 C37.2 D1.3 D2.C D3.C D4.C J1.A1 J1.A12 J1.B1 J1.B12 J1.S1 J1.S2 J1.S3 J1.S4 J2.2 J3.6 J4.6 P4.2 P5.2 P6.2 Q1.E Q2.E Q3.E Q4.E Q5.2 Q6.2 Q7.2 Q8.2 Q10.E Q11.E Q12.2 Q13.2 R2.2 R3.2 R4.2 R12.2 R20.2 R28.2 R43.2 R44.2 R45.2 R46.2 R52.2 R53.2 S1.1 S1.4 S1.5 S2.1 S2.4 S2.5 S3.1 S3.4 S3.5 S4.1 TP5.1 U1.7 U1.9 U1.15 U1.16 U2.1 U2.2 U2.42 U2.43 U2.46 U2.47 U2.48 U2.49 U2.50 U2.51 U2.52 U2.53 U2.54 U2.55 U2.56 U2.57 U2.58 U2.59 U2.60 U2.61 U2.61_1 U2.61_2 U2.61_3 U2.61_4 U2.61_5 U2.61_6 U2.61_7 U2.61_8 U2.62 U2.63 U2.64 U2.65 U3.7 U3.9 U3.15 U3.16 U4.3 U4.9 U4.10 U4.11 U4.12 U5.2 U5.3 U5.6 U5.7 U5.9 U5.10 U5.11 U6.2 U6.4 U7.2 U7.4 U9.9 U9.18 U9.23 U9.24 U9.25
"GPIO 1": R13.2 U9.16
"GPIO 2": R14.2 U9.17
INT: R26.2 U2.22 U9.22
"INT1 IMU": U2.25 U5.4
"IPROPI M1": C17.1 C36.1 R4.1 U1.6 U2.20
"IPROPI M2": C18.1 C37.1 R12.1 U2.21 U3.6
"IR1 FLOOR": R22.1 U2.18 U6.3
"IR2 FLOOR": R24.1 U2.19 U7.3
"IR 1": Q4.C R5.1 R38.2
"IR 2": Q1.C R10.1 R32.2
"IR 3": Q2.C R17.1 R34.2
"IR 4": Q3.C R18.1 R36.2
"IR 5": Q10.C R47.2 R54.1
"IR 6": Q11.C R49.2 R55.1
NetC1_1: C1.1 U1.13
NetC1_2: C1.2 U1.14
NetC13_1: C13.1 U3.13
NetC13_2: C13.2 U3.14
NetC25_1: C25.1 U4.8
NetD2_A: D2.A R11.1
NetD3_A: D3.A R13.1
NetD4_A: D4.A R14.1
NetD5_A: D5.A R16.2
NetD5_C: D5.C Q12.3
NetD6_A: D6.A R31.2
NetD6_C: D6.C Q5.3
NetD7_A: D7.A R33.2
NetD7_C: D7.C Q6.3
NetD8_A: D8.A R35.2
NetD8_C: D8.C Q7.3
NetD9_A: D9.A R37.2
NetD9_C: D9.C Q8.3
NetD10_A: D10.A R48.2
NetD10_C: D10.C Q13.3
NetJ1_A5: J1.A5 R2.1
NetJ1_B5: J1.B5 R3.1
NetQ5_1: Q5.1 R39.1 R43.1
NetQ6_1: Q6.1 R40.1 R44.1
NetQ7_1: Q7.1 R41.1 R45.1
NetQ8_1: Q8.1 R42.1 R46.1
NetQ9_4: Q9.4 R25.1 S4.2
NetQ12_1: Q12.1 R50.1 R52.1
NetQ13_1: Q13.1 R51.1 R53.1
NetR7_2: R7.2 U2.23
NetR8_2: R8.2 U2.24
NetR21_1: R21.1 U6.1
NetR23_1: R23.1 U7.1
"NFAULT M1": R9.1 U1.4 U9.6
"NFAULT M2": R15.1 U3.4 U9.7
NSLEEP: U1.3 U3.3 U9.1
"ON/OFF IR 1": R42.2 U9.10
"ON/OFF IR 2": R39.2 U9.11
"ON/OFF IR 3": R40.2 U9.12
"ON/OFF IR 4": R41.2 U9.13
"ON/OFF IR 5": R50.2 U9.14
"ON/OFF IR 6": R51.2 U9.15
"PWM M1": U1.1 U2.33
"PWM M2": U2.27 U3.1
RX: TP12.1 U2.40
SCL: P4.3 P5.3 P6.3 R27.2 TP7.1 U2.13 U9.19
SCLK: TP2.1 U2.16 U5.13
SDA: P4.4 P5.4 P6.4 R30.1 TP9.1 U2.12 U9.20
SDI: TP4.1 U2.17 U5.14
SDO: TP6.1 U2.15 U5.1
SWITCH: S3.2 S3.3 U9.2
TX: TP11.1 U2.39
USB_N: D1.2 J1.A7 J1.B7 R7.1
USB_P: D1.1 J1.A6 J1.B6 R8.1
"V METER": C11.1 R28.1 R29.1 U2.11
"VCP M1": C8.1 U1.12
"VCP M2": C20.1 U3.12
VDDIO: C3.1 C4.2 C9.1 C14.1 C22.1 C27.2 C28.1 C30.1 C32.1 C33.1 C34.1 C35.1 J3.3 J4.3 P4.1 P5.1 P6.1 R1.2 R6.2 R9.2 R11.2 R15.2 R16.1 R19.1 R21.2 R22.2 R23.2 R24.2 R26.1 R27.1 R30.2 R31.1 R32.1 R33.1 R34.1 R35.1 R36.1 R37.1 R38.1 R47.1 R48.1 R49.1 TP3.1 U1.5 U2.3 U3.5 U4.4 U4.5 U5.5 U5.8 U9.21
"VM M1": C5.2 C6.2 C7.1 C8.2 C16.1 C20.2 C23.2 C26.2 C31.1 Q9.5 Q9.6 Q9.7 R29.2 TP1.1 U1.11 U3.11 U4.1 U4.2
XSHUT1: P4.6 U9.3
XSHUT2: P5.6 U9.4
XSHUT3: P6.6 U9.5
pads on no net: J1.A8 J1.B8 J3.S1 J3.S2 J4.S1 J4.S2 M1.14 M1.15 M2.14 M2.15 P4.5 P5.5 P6.5 Q9.8 S4. S4.3 S4.S1 S4.S2 S4.S3 S4.S4 TP1.2 TP2.2 TP3.2 TP4.2 TP5.2 TP6.2 TP7.2 TP8.2 TP9.2 TP11.2 TP12.2 TP19.2 TP20.2 TP21.2 TP22.2 U1.17 U2.26 U2.35 U2.36 U2.37 U2.38 U2.41 U2.44 U3.17 U4.7 U9.8
copper on no net: | length 65
  Top Layer w0.254: 137.144,45.563 169.637,45.563 202.137,45.563

## Polygon pours and split planes (outlines as drawn)
GND on GND (split plane): 170.525,143.545 171.406,143.515 172.286,143.466 173.165,143.397 174.041,143.308 174.916,143.199 175.788,143.071 176.657,142.924 177.522,142.756 178.384,142.57 179.24,142.364 180.093,142.139 180.939,141.895 181.781,141.632 182.616,141.351 183.444,141.05 184.266,140.731 185.08,140.394 185.887,140.039 186.685,139.665 187.474,139.274 188.255,138.865 189.027,138.439 189.788,137.995 190.54,137.535 191.28,137.058 192.01,136.564 192.729,136.054 193.436,135.528 194.132,134.986 194.814,134.429 195.485,133.857 196.142,133.269 196.785,132.667 197.416,132.051 198.032,131.421 198.634,130.777 199.221,130.12 199.793,129.45 200.35,128.767 200.892,128.072 201.418,127.365 201.928,126.646 202.422,125.916 202.899,125.175 203.36,124.424 203.803,123.662 204.229,122.891 204.638,122.11 205.03,121.321 205.403,120.522 205.758,119.716 206.096,118.902 206.415,118.08 206.634,117.476 206.634,101.073 202.144,101.073 202.044,101.063 201.949,101.034 201.86,100.987 201.783,100.924 201.72,100.846 201.672,100.758 201.643,100.662 201.634,100.563 201.634,46.073 137.654,46.073 137.654,100.563 137.645,100.662 137.616,100.758 137.568,100.846 137.505,100.924 137.428,100.987 137.339,101.034 137.244,101.063 137.144,101.073 132.654,101.073 132.654,117.476 132.873,118.08 133.192,118.902 133.53,119.716 133.885,120.522 134.259,121.321 134.65,122.11 135.059,122.891 135.485,123.662 135.928,124.424 136.389,125.175 136.866,125.916 137.36,126.646 137.87,127.365 138.396,128.072 138.938,128.767 139.495,129.45 140.067,130.12 140.654,130.777 141.256,131.421 141.872,132.051 142.503,132.667 143.146,133.269 143.804,133.857 144.474,134.429 145.156,134.986 145.852,135.528 146.559,136.054 147.278,136.564 148.008,137.058 148.748,137.535 149.5,137.995 150.262,138.439 151.033,138.865 151.814,139.274 152.603,139.665 153.402,140.039 154.208,140.394 155.022,140.731 155.844,141.05 156.672,141.351 157.507,141.632 158.349,141.895 159.195,142.139 160.048,142.364 160.905,142.57 161.766,142.756 162.631,142.924 163.5,143.071 164.372,143.199 165.247,143.308 166.123,143.397 167.002,143.466 167.882,143.515 168.763,143.545 169.644,143.555

## Silkscreen, mask and mechanical layers (free items; w line width, h text height)
Top Overlay:
  the board outline again, w0.127